# Altium PCB PCB.PcbDoc
Units mm, origin at the board's own origin, x right, y up, seen from the top; angles counter-clockwise.
Board outline 100 x 100 mm, 2 copper layers (Top Layer, Bottom Layer); 55 components, 17 nets, 124 pads, 8 vias.
Unrouted connection lines stored in the file: 3.
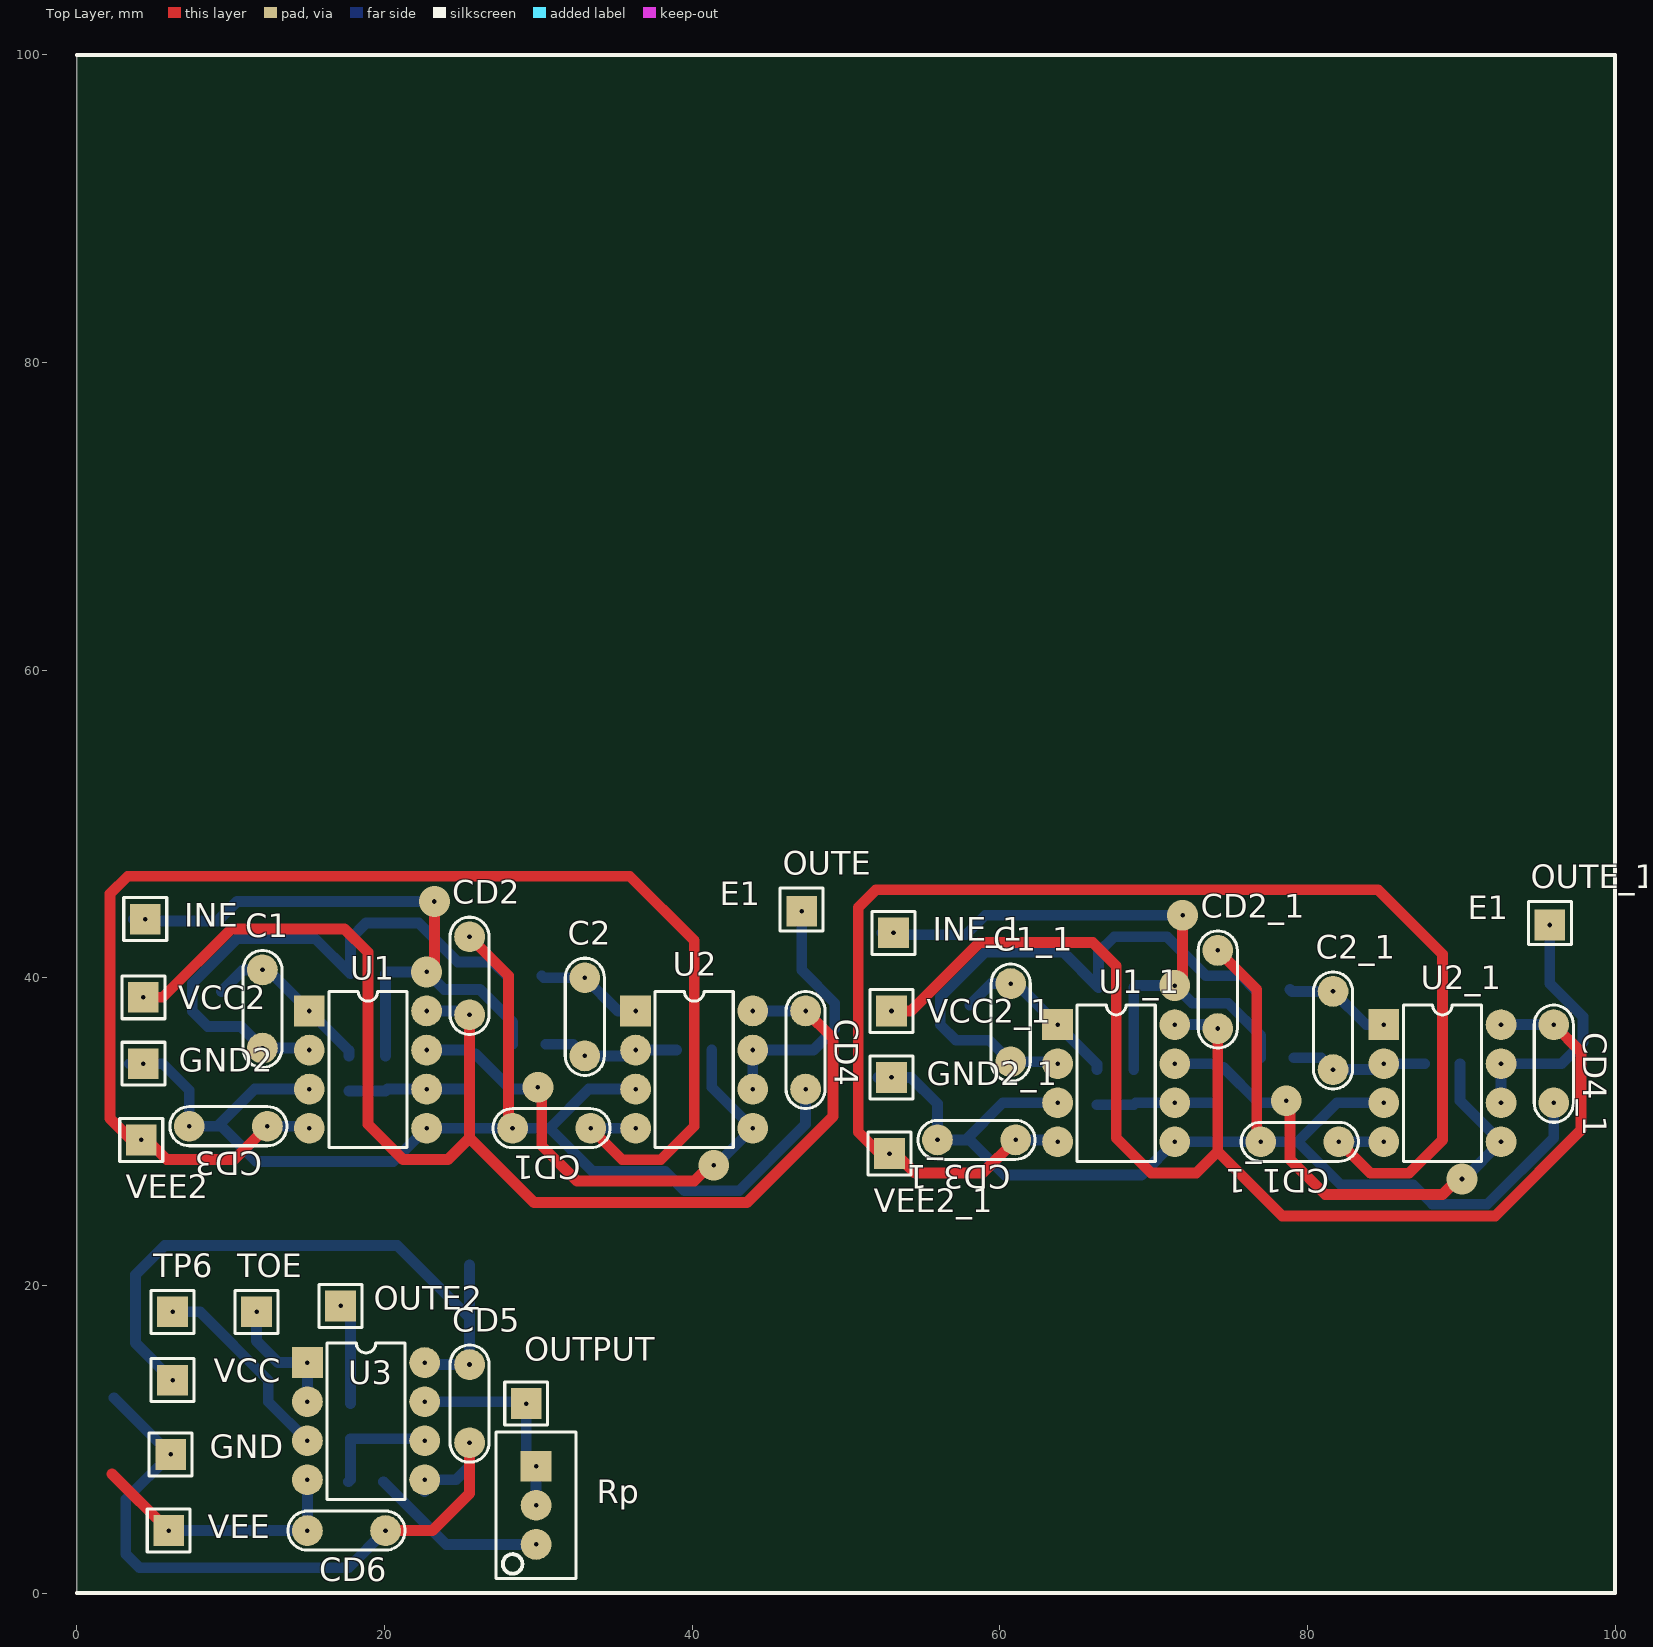
[diagram p0: Top Layer view]
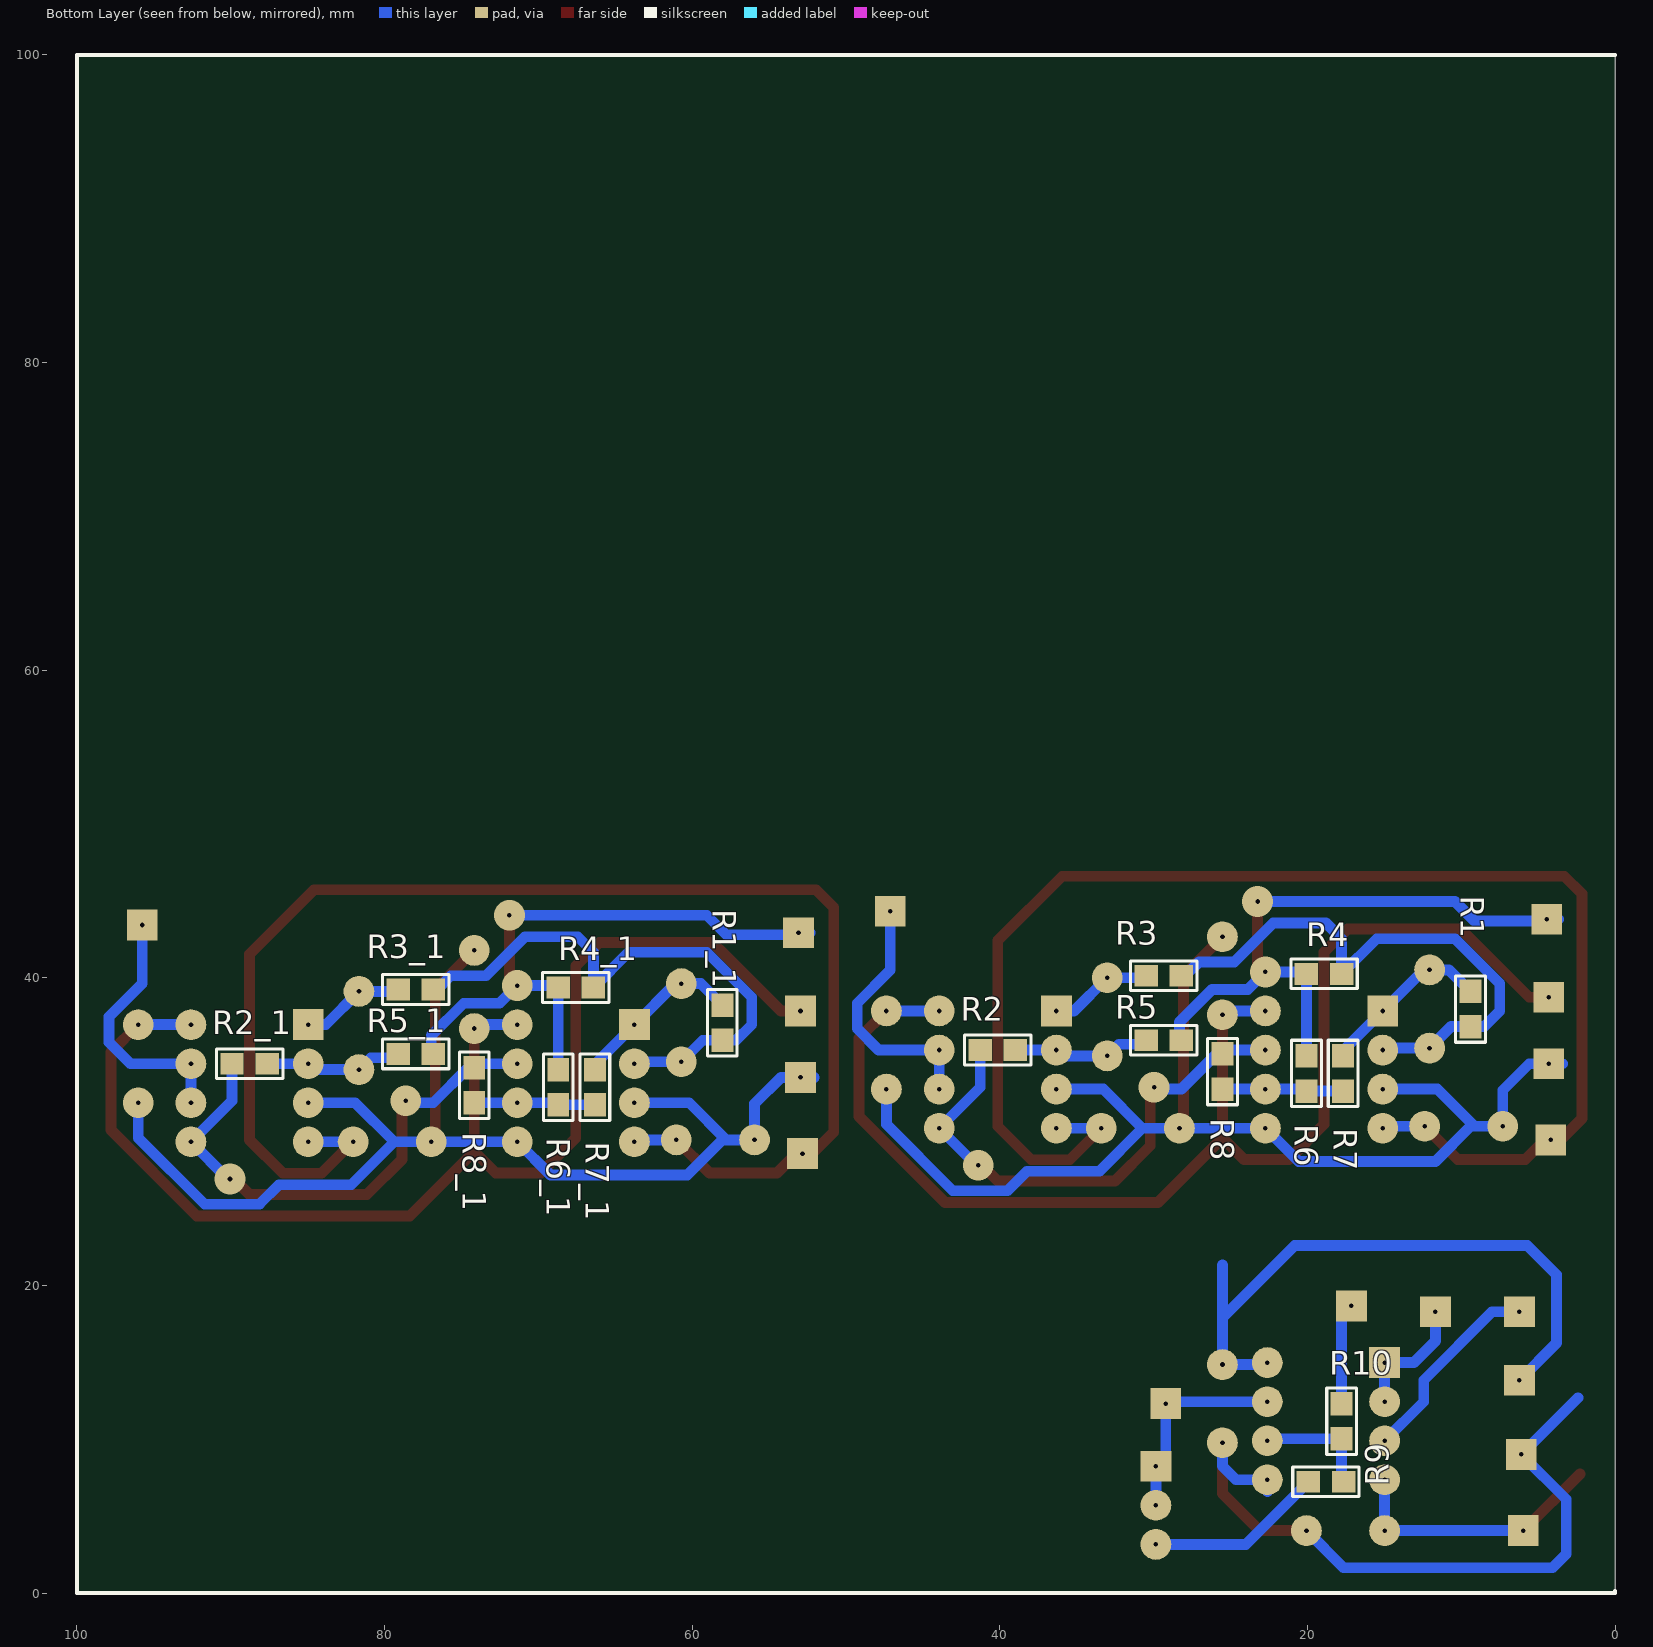
[diagram p1: Bottom Layer view, seen from below]
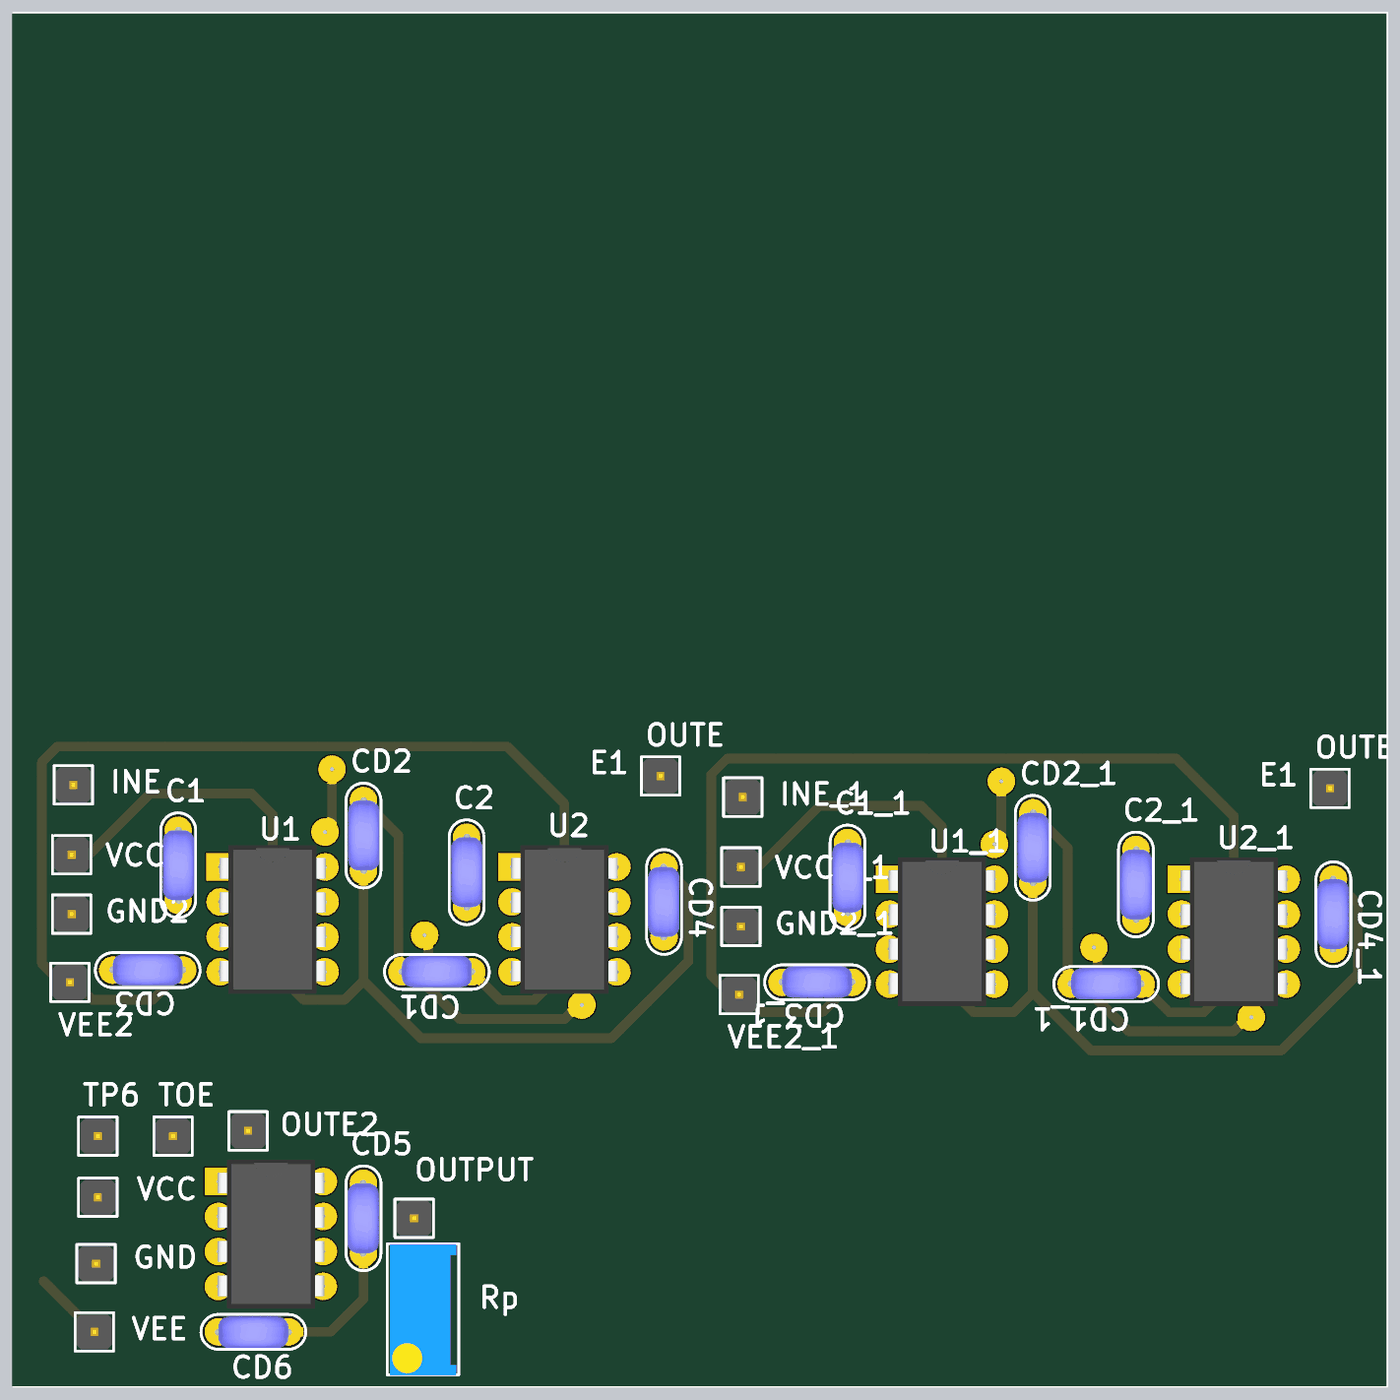
[diagram p2: 3D render of the assembled board from above, using the file's embedded part models]
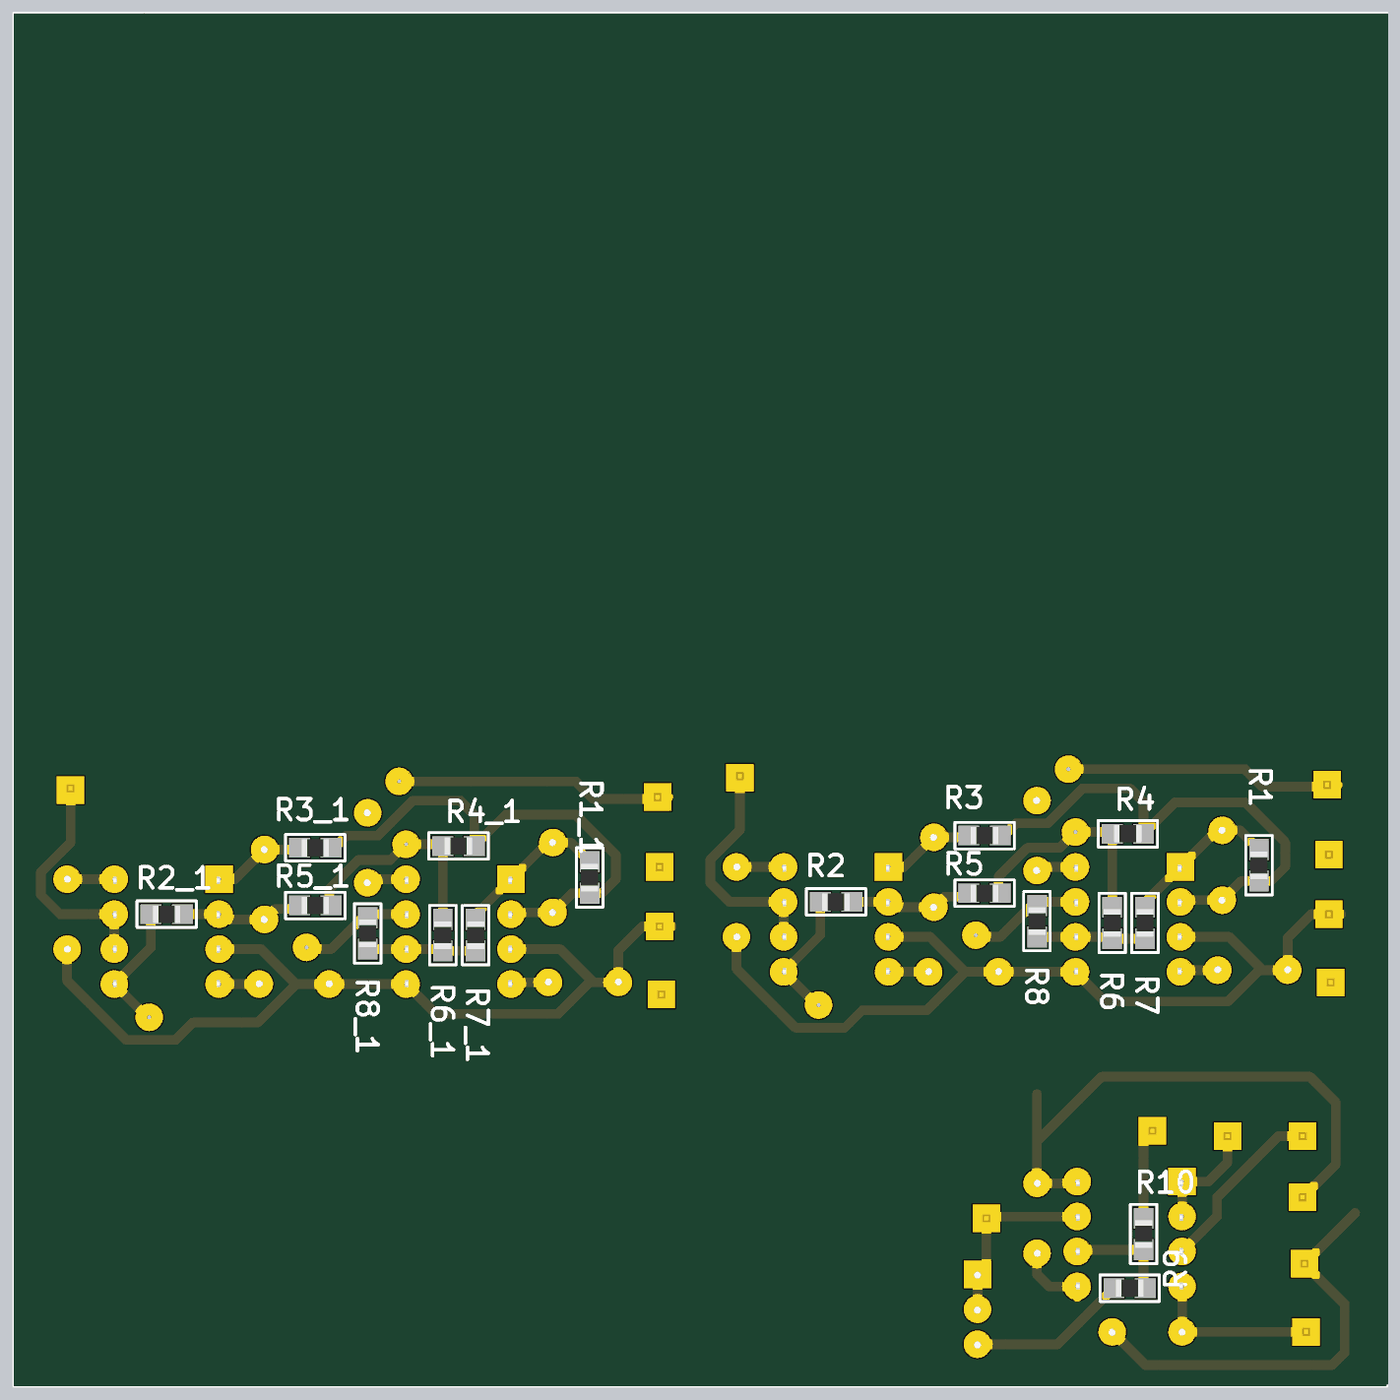
[diagram p3: 3D render of the assembled board from below, using the file's embedded part models]

## Layer stack, top to bottom
Top Solder: solder mask 0.0102, Solder Resist, Dk 3.5
Top Layer: signal copper 0.0356
Dielectric 1: dielectric 0.32, FR-4, Dk 4.8
Bottom Layer: signal copper 0.0356
Bottom Solder: solder mask 0.0102, Solder Resist, Dk 3.5

## Board outline
0,0 100,0 100,100 0,100

## Design rules (kind name [scope] priority, off if disabled: settings)
Clearance [All] p1: gap=0.3 ignorepadtopadclearanceinfootprint=FALSE
PolygonConnect [All] p1: connectstyle=Relief reliefconductorwidth=0.254 reliefentries=4 polygonreliefangle="90 Angle" airgapwidth=0.254
RoutingVias [All] p1: holewidth=0.711 width=1.27 viastyle="Through Hole" minholewidth=0.711 minwidth=1.27 maxholewidth=0.711 maxwidth=1.27
SolderMaskExpansion [All] p1: expansion=0.102
Width [All] p1: maxlimit=0.7 minlimit=0.7 preferedwidth=0.7 minimp=50.000000 maximp=50.000000 favimp=50.000000
30 further rules are at their usual default settings.

## Classes and differential pairs
component class Esquemático: C1 C2 CD1 CD2 CD3 CD4 CD5 CD6 GND GND2 INE OUTE OUTE2 OUTPUT R1 R2 R3 R4 R5 R6 R7 R8 R9 R10 Rp TOE TP6 TP10 TP11 TP12 U1 U2 U3 VCC VCC2 VEE VEE2

## Components (designator, comment, footprint, x,y, rotation, side; value= is the part's Value field where it differs from the comment)
C1 "10n" CAP200 12.065,37.973 r90 top
C1_1 "10n" CAP200 60.706,37.084 r90 top (schematic designator C1)
C2 "10n" CAP200 33.02,37.465 r90 top
C2_1 "10n" CAP200 81.661,36.576 r90 top (schematic designator C2)
CD1 "CAP" CAP200 30.861,30.226 r180 top
CD1_1 "CAP" CAP200 79.502,29.337 r180 top (schematic designator CD1)
CD2 "CAP" CAP200 25.527,40.132 r90 top
CD2_1 "CAP" CAP200 74.168,39.243 r90 top (schematic designator CD2)
CD3 "CAP" CAP200 9.847,30.353 r180 top
CD3_1 "CAP" CAP200 58.488,29.464 r180 top (schematic designator CD3)
CD4 "CAP" CAP200 47.371,35.306 r270 top
CD4_1 "CAP" CAP200 96.012,34.417 r270 top (schematic designator CD4)
CD5 "CAP" CAP200 25.527,12.319 r270 top
CD6 "CAP" CAP200 17.526,4.064 r0 top
GND "TP" TPTH#1 6.096,9.017 r90 top (schematic designator TP11)
GND2 "TP" TPTH#1 4.318,34.417 r0 top
GND2_1 "TP" TPTH#1 52.959,33.528 r0 top (schematic designator GND2)
INE "TP" TPTH#1 4.445,43.815 r0 top
INE_1 "TP" TPTH#1 53.086,42.926 r0 top (schematic designator INE)
OUTE "TP" TPTH#2 47.117,44.45 r0 top
OUTE2 "TP" TPTH#1 17.145,18.669 r270 top
OUTE_1 "TP" TPTH#2 95.758,43.561 r0 top (schematic designator OUTE)
OUTPUT "TP" TPTH#1 29.21,12.319 r270 top
R1 "5k6" 0805 9.398,37.973 r90 bottom
R1_1 "5k6" 0805 58.039,37.084 r90 bottom (schematic designator R1)
R2 "1k5" 0805 40.132,35.306 r180 bottom
R2_1 "1k5" 0805 88.773,34.417 r180 bottom (schematic designator R2)
R3 "1k" 0805 29.337,40.132 r0 bottom
R3_1 "1k" 0805 77.978,39.243 r0 bottom (schematic designator R3)
R4 "10k" 0805 18.923,40.259 r180 bottom
R4_1 "10k" 0805 67.564,39.37 r180 bottom (schematic designator R4)
R5 "inf" 0805 29.337,35.941 r0 bottom
R5_1 "inf" 0805 77.978,35.052 r0 bottom (schematic designator R5)
R6 "1k8" 0805 20.066,33.782 r270 bottom
R6_1 "1k8" 0805 68.707,32.893 r270 bottom (schematic designator R6)
R7 "1k" 0805 17.681,33.782 r270 bottom
R7_1 "1k" 0805 66.322,32.893 r270 bottom (schematic designator R7)
R8 "1k" 0805 25.527,33.909 r90 bottom
R8_1 "1k" 0805 74.168,33.02 r90 bottom (schematic designator R8)
R9 "RES" 0805 18.796,7.239 r0 bottom
R10 "RES" 0805 17.78,11.176 r270 bottom
Rp "PRESET" "PRESET V" 29.851,5.705 r270 top
TOE "TP" TPTH#1 11.684,18.288 r270 top (schematic designator TP9)
TP6 "TP" TPTH#1 6.223,18.288 r270 top
U1 "TL082" DIP8 15.113,37.846 r0 top
U1_1 "TL082" DIP8 63.754,36.957 r0 top (schematic designator U1)
U2 "TL082" DIP8 36.322,37.846 r0 top
U2_1 "TL082" DIP8 84.963,36.957 r0 top (schematic designator U2)
U3 "LM833" DIP8 14.986,14.986 r0 top
VCC "TP" TPTH#1 6.223,13.843 r180 top (schematic designator TP10)
VCC2 "TP" TPTH#1 4.318,38.735 r0 top
VCC2_1 "TP" TPTH#1 52.959,37.846 r0 top (schematic designator VCC2)
VEE "TP" TPTH#1 5.969,4.064 r180 top (schematic designator TP12)
VEE2 "TP" TPTH#1 4.186,29.464 r0 top
VEE2_1 "TP" TPTH#1 52.827,28.575 r0 top (schematic designator VEE2)

## Footprints (in the part's own frame and the unit in brackets; to place one, negate y for a bottom-side part, rotate by r counter-clockwise, add the part's x,y. Pads: shape width x height; smd on the part's side, far side on the other; paste and mask are expansions set on the pad)
0805 [mil] "Pasivo 0805"
  rect 60x56 smd: 1(-45,0) 2(45,0)
  silkscreen extent -85,-38 85,38, body extent -40,-25 39,25, height 15
CAP200 [mm]
  round 2 hole 0.3: 1(-2.54,0) 2(2.54,0)
  silkscreen extent -3.81,-1.27 3.81,1.27, body extent -2.79,-1.17 2.79,1.12, height 6.24
DIP8 [mm]
  rect 2x2 hole 0.3: 1(0,0)
  round 2 hole 0.3: 2(0,-2.54) 3(0,-5.08) 4(0,-7.62) 5(7.62,-7.62) 6(7.62,-5.08) 7(7.62,-2.54) 8(7.62,0)
  silkscreen extent 1.27,-8.89 6.35,1.27, body extent -0.06,-9.21 7.7,1.59, height 4.5
"PRESET V" [mm]
  rect 2x2 hole 0.3: 1(-2.54,0)
  round 2 hole 0.3: 2(0,0) 3(2.54,0)
  silkscreen extent -4.76,-2.6 4.76,2.6, body extent -4.7,-2.42 4.83,2.42, height 11.55
TPTH#1 [mm]
  rect 2x2 hole 0.3: 1(0,0)
  silkscreen extent -1.4,-1.4 1.4,1.4, body extent -1.27,-1.27 1.27,1.27, height 6.04
TPTH#2 [mm]
  rect 2x2 hole 0.3: 1(0,-0.127)
  silkscreen extent -1.4,-1.4 1.4,1.4, body extent -1.27,-1.27 1.27,1.27, height 6.04

## Part data
C1 C1_1 C2 C2_1: library part CAP
R1 R1_1 R2 R2_1 R3 R3_1 R4 R4_1 R5 R5_1 R6 R6_1 R7 R7_1 R8 R8_1: library part RES
U1 U1_1 U2 U2_1: library part LM833, "Dual Audio Operational Amplifier"
U3: "Dual Audio Operational Amplifier"

## Via types
v1: diameter 2, hole 0.3, Top Layer to Bottom Layer, 8 vias

## Nets (pads, with @x,y where several pads share a name; then routed paths per layer and width w, separated by ;. In a path a pad name is that pad's centre, name@x,y a point inside that pad or via, vN(x,y) a via of type N, cw(c..) or ccw(c..) an arc to the next point about the centre after c; other vN are vias at no path point)
GND: CD1.2 CD2.2 CD3.2 CD4.2 CD5.2 CD6.2 GND2.1 GND.1 U1.3 U1.5 U2.3 U3.5 | length 128.3
  Top Layer w0.7: CD6.2 23.114,4.064 25.527,6.477 CD5.2 ; CD2.2 28.067,40.132 28.067,30.48 CD1.2
  Bottom Layer w0.7: 2.413,12.7 GND.1 3.175,6.096 3.175,2.54 4.064,1.651 17.653,1.651 CD6.2 ; GND2.1@3.429,34.417 GND2.1 5.588,34.417 7.307,32.698 CD3.2 9.144,30.353 ; U1.3 11.557,32.766 9.144,30.353 ; U3.5@22.606,6.604 U3.5 24.638,7.366 25.527,8.255 CD5.2 ; U2.3 33.274,32.766 30.734,30.226 ; CD4.2 47.371,30.48 43.054,26.163 39.496,26.163 38.227,27.432 33.528,27.432 30.734,30.226 ; 9.144,30.353 9.398,30.353 11.684,28.067 20.574,28.067 U1.5 CD1.2 30.734,30.226
in: INE.1 R4.1 R5.1 R6.1 | length 41.2
  Top Layer w0.7: v1@22.86,40.513 23.241,40.894 v1(23.241,44.958)
  Bottom Layer w0.7: INE.1@3.683,43.815 3.81,43.688 9.144,43.688 10.414,44.958 v1(23.241,44.958) ; R6.1 R4.1 20.193,40.386 v1(22.733,40.386) 23.877,39.242 26.21,39.242 28.321,37.131 R5.1@28.321,35.687
INPUT: TP6.1 U3.3 | length 13.1
  Bottom Layer w0.7: TP6.1 8.001,18.288 12.446,13.843 12.446,12.446 U3.3
NetC1_1: C1.1 R1.1 R3.1 R4.2 U1.2 | length 37.2
  Bottom Layer w0.7: U1.2 14.986,35.433 C1.1 10.668,36.83 R1.1 8.509,36.83 7.493,37.846 7.493,39.624 10.414,42.545 15.494,42.545 R4.2 17.78,42.545 18.796,43.561 22.225,43.561 24.765,41.021 27.051,41.021 R3.1@27.94,40.132
NetC1_2: C1.2 R1.2 R7.1 U1.1 | length 11.4
  Bottom Layer w0.7: R1.2 10.795,40.513 C1.2 12.446,40.513 U1.1 17.681,35.278 R7.1
NetC2_1: C2.1 R2.2 R5.2 U2.2 | length 9
  Bottom Layer w0.7: R5.2@30.48,35.687 32.258,35.687 C2.1 35.941,34.925 U2.2 R2.2
NetC2_2: C2.2 R3.2 U2.1 | length 7
  Bottom Layer w0.7: R3.2@30.226,40.132 30.353,40.005 C2.2 35.179,37.846 U2.1
NetR6_2: R6.2 R7.2 R8.1 U1.6 | length 7.9
  Bottom Layer w0.7: R7.2 R6.2 20.193,32.766 U1.6 R8.1
NetR9_1: R9.1 R10.2 U3.6 | length 7.7
  Bottom Layer w0.7: R9.1 17.78,7.366 R10.2 22.479,10.033 U3.6
NetR9_2: R9.2 Rp.3 | length 11.6
  Bottom Layer w0.7: R9.2 24.013,3.165 Rp.3
out: R2.1 R8.2 U1.7 U2.5 | length 34.1
  Top Layer w0.7: v1(29.972,32.893) 30.226,32.639 30.226,29.083 32.512,26.797 40.132,26.797 v1@41.148,27.813
  Bottom Layer w0.7: U1.7 25.273,35.306 R8.2 25.908,35.052 28.194,32.766 v1@29.845,32.766 ; R2.1 41.275,32.893 U2.5 41.529,27.813 v1(41.402,27.813)
"OUT E": OUTE2.1 R10.1 | length 6.6
  Bottom Layer w0.7: R10.1 OUTE2.1@17.78,18.923
"OUT ETAPA": OUTE.1 U2.6 U2.7 | length 17
  Bottom Layer w0.7: U2.6 U2.7 47.879,35.306 49.276,36.703 49.276,38.354 47.117,40.513 OUTE.1
"OUT PCB": OUTPUT.1 Rp.1 Rp.2 U3.7 | length 13.5
  Bottom Layer w0.7: U3.7 29.083,12.446 OUTPUT.1 29.21,8.886 Rp.1 Rp.2
"TO E": TOE.1 U3.1 U3.2 | length 8.3
  Bottom Layer w0.7: TOE.1 11.684,16.383 13.081,14.986 U3.1 U3.2
VCC: CD2.1 CD4.1 CD5.1 U1.8 U2.8 U3.8 VCC2.1 VCC.1 | length 128.3
  Top Layer w0.7: VCC2.1@3.683,38.735 VCC2.1 5.588,38.735 10.033,43.18 17.399,43.18 18.923,41.656 18.923,30.48 21.209,28.194 24.13,28.194 25.527,29.591 ; CD2.1 25.527,29.591 ; CD4.1 49.149,36.068 49.149,30.988 43.561,25.4 29.718,25.4 25.527,29.591
  Bottom Layer w0.7: VCC.1 3.81,16.256 3.81,20.701 5.715,22.606 20.828,22.606 25.527,17.907 ; U3.8 22.733,14.859 CD5.1 25.527,17.907 ; U1.8 CD2.1@25.527,37.846 ; 25.527,21.336 25.527,17.907 ; U2.8 CD4.1
VEE: CD1.1 CD3.1 CD6.1 U1.4 U2.4 U3.4 VEE2.1 VEE.1 | length 110.8
  Top Layer w0.7: 2.286,7.747 VEE.1 ; CD3.1 10.228,28.194 5.842,28.194 4.572,29.464 VEE2.1 3.556,29.464 2.159,30.861 2.159,45.466 3.301,46.608 35.942,46.608 40.132,42.418 40.132,30.353 37.957,28.178 35.449,28.178 CD1.1
  Bottom Layer w0.7: VEE.1 CD6.1 U3.4 ; CD3.1 14.986,30.353 U1.4 ; CD1.1 U2.4
pads on no net: C1_1.1 C1_1.2 C2_1.1 C2_1.2 CD1_1.1 CD1_1.2 CD2_1.1 CD2_1.2 CD3_1.1 CD3_1.2 CD4_1.1 CD4_1.2 GND2_1.1 INE_1.1 OUTE_1.1 R1_1.1 R1_1.2 R2_1.1 R2_1.2 R3_1.1 R3_1.2 R4_1.1 R4_1.2 R5_1.1 R5_1.2 R6_1.1 R6_1.2 R7_1.1 R7_1.2 R8_1.1 R8_1.2 U1_1.1 U1_1.2 U1_1.3 U1_1.4 U1_1.5 U1_1.6 U1_1.7 U1_1.8 U2_1.1 U2_1.2 U2_1.3 U2_1.4 U2_1.5 U2_1.6 U2_1.7 U2_1.8 VCC2_1.1 VEE2_1.1
copper on no net: | length 1026.3
  Top Layer w0.254: 0,0 100,0 100,100 0,100
  Top Layer w0.7: 52.324,37.846 52.959,37.846 54.229,37.846 58.674,42.291 66.04,42.291 67.564,40.767 67.564,29.591 69.85,27.305 72.771,27.305 74.168,28.702 ; 61.028,29.464 58.869,27.305 54.483,27.305 53.213,28.575 52.827,28.575 52.197,28.575 50.8,29.972 50.8,44.577 51.942,45.719 84.583,45.719 88.773,41.529 88.773,29.464 86.598,27.289 84.09,27.289 82.042,29.337 ; v1@71.501,39.624 71.882,40.005 v1(71.882,44.069) ; 74.168,36.703 74.168,28.702 ; 74.168,41.783 76.708,39.243 76.708,29.591 76.962,29.337 ; v1(78.613,32.004) 78.867,31.75 78.867,28.194 81.153,25.908 88.773,25.908 v1@89.789,26.924 ; 96.012,36.957 97.79,35.179 97.79,30.099 92.202,24.511 78.359,24.511 74.168,28.702
  Bottom Layer w0.254: 0,0 100,0 100,100 0,100
  Bottom Layer w0.7: 52.07,33.528 52.959,33.528 54.229,33.528 55.948,31.809 55.948,29.464 57.785,29.464 ; 52.324,42.926 52.451,42.799 57.785,42.799 59.055,44.069 v1(71.882,44.069) ; 58.039,38.227 59.436,39.624 60.706,39.624 61.087,39.624 63.754,36.957 66.322,34.389 66.322,34.036 ; 61.028,29.464 63.627,29.464 63.754,29.337 ; 63.754,31.877 60.198,31.877 57.785,29.464 ; 63.754,34.417 63.627,34.544 60.706,34.544 59.309,35.941 58.039,35.941 57.15,35.941 56.134,36.957 56.134,38.735 59.055,41.656 64.135,41.656 66.421,39.37 66.421,41.656 67.437,42.672 70.866,42.672 73.406,40.132 75.692,40.132 76.581,39.243 ; 66.322,31.75 68.707,31.75 68.834,31.877 71.374,31.877 74.168,31.877 ; 68.707,34.036 68.707,39.37 68.834,39.497 v1(71.374,39.497) 72.518,38.353 74.851,38.353 76.962,36.242 76.962,34.798 ; 71.374,34.417 73.914,34.417 74.168,34.163 74.549,34.163 76.835,31.877 v1@78.486,31.877 ; 71.374,36.957 74.168,36.957 ; 78.867,39.243 78.994,39.116 81.661,39.116 83.82,36.957 84.963,36.957 ; 79.121,34.798 80.899,34.798 81.661,34.036 84.582,34.036 84.963,34.417 87.63,34.417 ; 82.042,29.337 84.963,29.337 ; 84.963,31.877 81.915,31.877 79.375,29.337 ; 89.916,34.417 89.916,32.004 92.583,29.337 90.17,26.924 v1(90.043,26.924) ; 92.583,31.877 92.583,34.417 96.52,34.417 97.917,35.814 97.917,37.465 95.758,39.624 95.758,43.434 ; 92.583,36.957 96.012,36.957 ; 96.012,31.877 96.012,29.591 91.695,25.274 88.137,25.274 86.868,26.543 82.169,26.543 79.375,29.337 ; 57.785,29.464 58.039,29.464 60.325,27.178 69.215,27.178 71.374,29.337 76.962,29.337 79.375,29.337

## Silkscreen, mask and mechanical layers (free items; w line width, h text height)
Top Overlay:
  lines w0.254: 0,0 100,0 100,100 0,100
  text "E1" at 41.783,44.704 h1.52
  text "E1" at 90.424,43.815 h1.52
Bottom Overlay:
  lines w0.254: 0,0.127 0,0 100,0 100,100 90.348,100 0,100